# Altium PCB Fuse Block - Car Mini compact (Box-KA11 Masterkit).PcbDoc
Units mm, origin at the board's own origin, x right, y up, seen from the top; angles counter-clockwise.
Board outline 82.7 x 49.3 mm, 2 copper layers (Top Layer, Bottom Layer); 14 components, 10 nets, 30 pads, 0 vias.
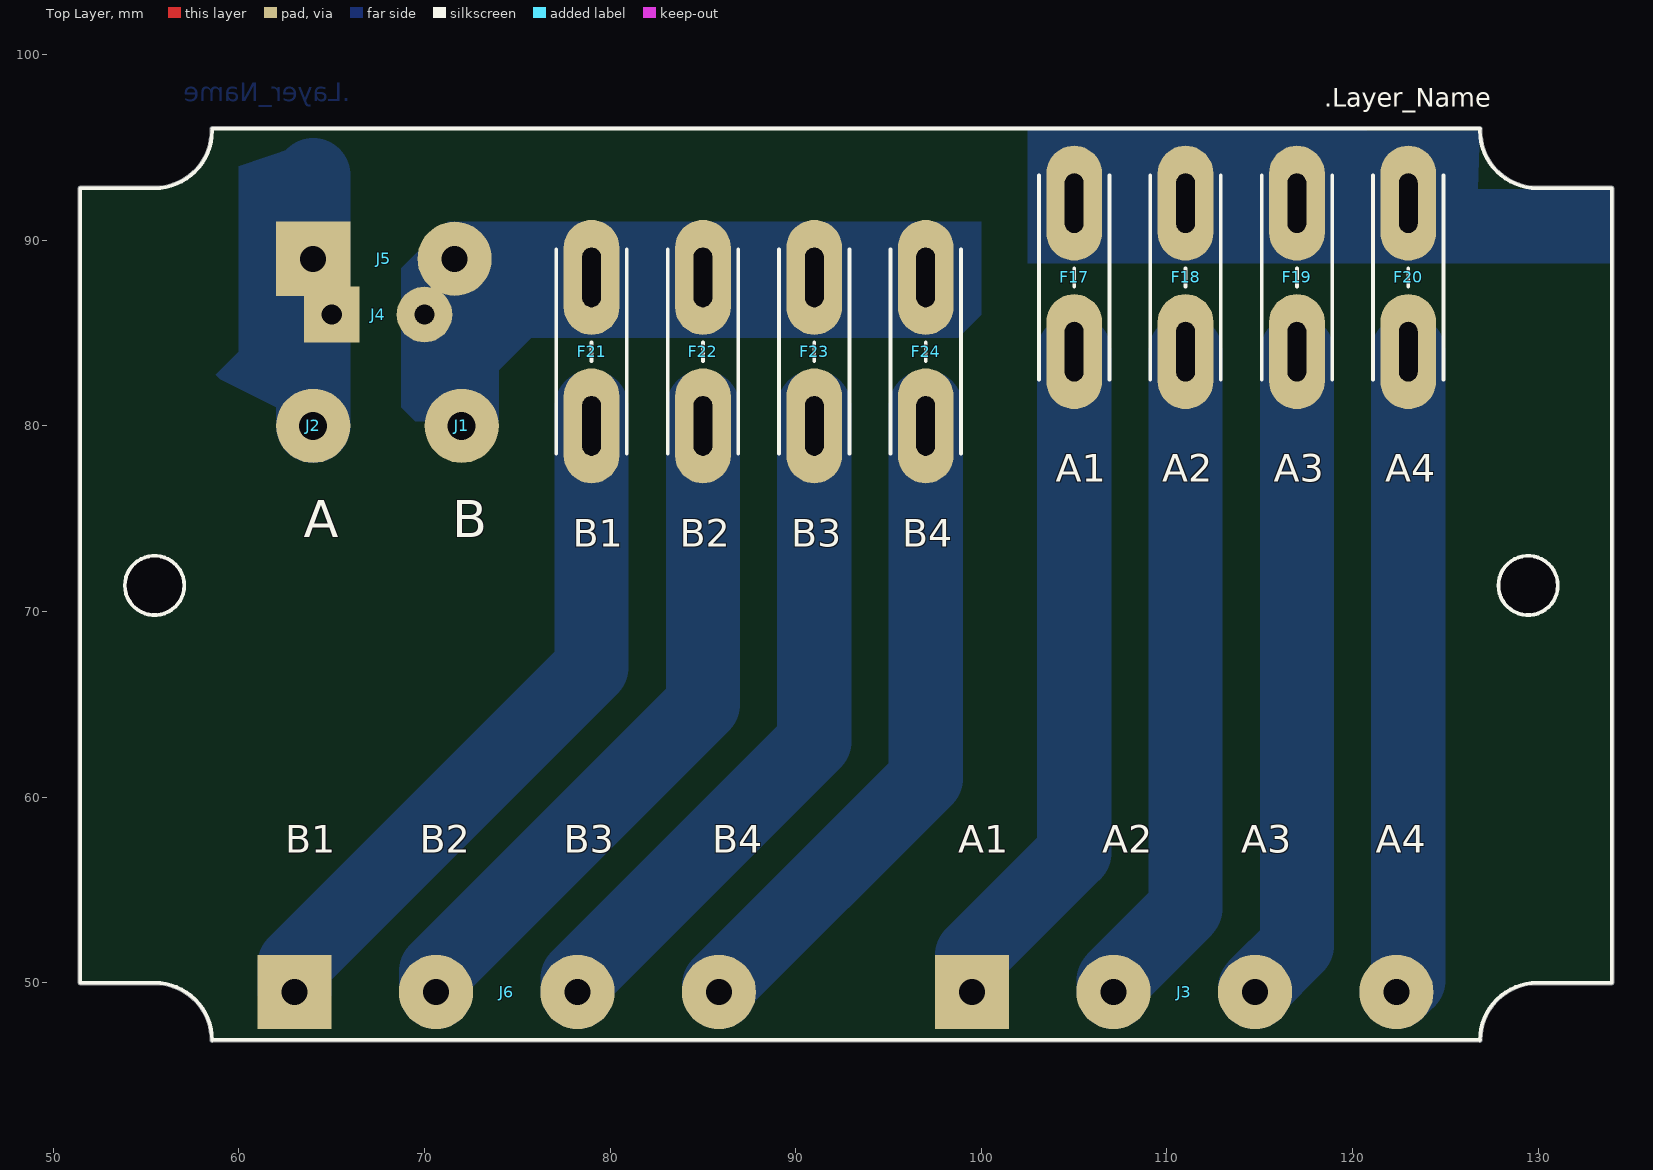
[diagram p0: Top Layer view]
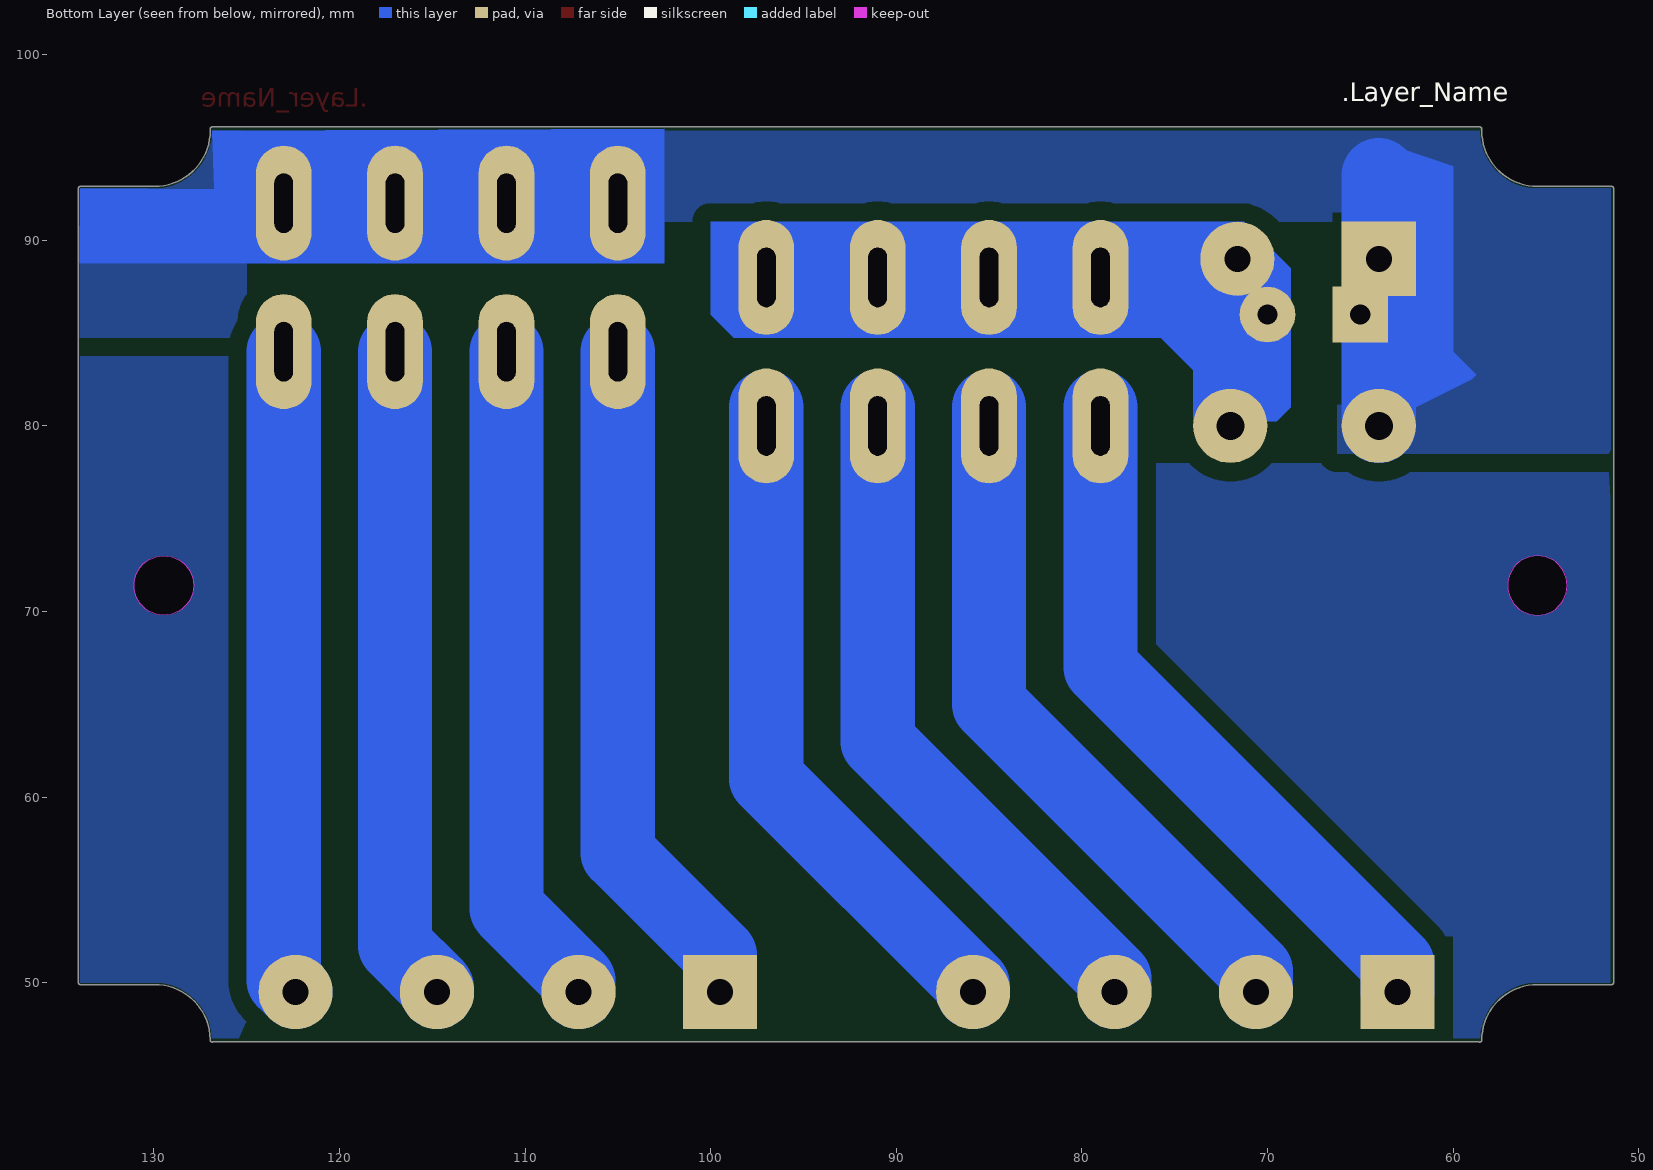
[diagram p1: Bottom Layer view, seen from below]

## Layer stack, top to bottom
Top Solder: solder mask 0.0102, Solder Resist, Dk 3.5
Top Layer: signal copper 0.0356
Dielectric 1: dielectric 0.32, FR-4, Dk 4.8
Bottom Layer: signal copper 0.0356
Bottom Solder: solder mask 0.0102, Solder Resist, Dk 3.5

## Board outline
55.458,49.902 cw(c55.458,46.902) 58.457,46.902 ccw(c58.558,46.902) 58.622,46.826 126.793,46.826 ccw(c126.858,46.902) 126.958,46.902 cw(c129.958,46.902) 126.958,46.903 ccw(c126.86,46.926) 126.961,46.926 ccw(c126.86,46.926) 126.958,46.947 cw(c129.958,46.902) 129.958,49.902 133.958,49.902 ccw(c133.958,50.002) 134.058,50.002 134.058,92.802 ccw(c133.958,92.802) 133.958,92.903 129.958,92.903 cw(c129.958,95.902) 126.958,95.902 ccw(c126.858,95.902) 126.946,95.951 ccw(c126.86,96.003) 126.96,96.003 ccw(c126.86,96.003) 126.86,96.104 58.56,96.104 ccw(c58.56,96.003) 58.472,95.955 ccw(c58.558,95.902) 58.457,95.902 cw(c55.458,95.902) 55.458,92.903 51.458,92.903 ccw(c51.458,92.802) 51.357,92.802 51.357,50.002 ccw(c51.458,50.002) 51.458,49.902
cut-out: 127.858,71.402 ccw(c129.458,71.402) 129.458,69.802 ccw(c129.458,71.402) 131.058,71.402 ccw(c129.458,71.402) 129.458,73.002 ccw(c129.458,71.402)
cut-out: 55.458,69.802 cw(c55.458,71.402) 53.858,71.402 cw(c55.458,71.402) 55.458,73.002 cw(c55.458,71.402) 57.058,71.402 cw(c55.458,71.402)

## Design rules (kind name [scope] priority, off if disabled: settings)
Clearance [All] p1: gap=1
ComponentClearance [All] p1: gap=0 collisioncheckmode=3 verticalgap=0.2 showdistances=FALSE
Height [All] p1: minheight=0 maxheight=25 prefheight=12.7
HoleSize [All] p1: absolutevalues=TRUE maxlimit=3.2 minlimit=0.4 maxpercent=80.000 minpercent=20.000
HoleToHoleClearance [All] p1: gap=0.2 allowstackedmicrovias=TRUE
PlaneClearance [All] p1: clearance=0.5
PlaneConnect [All] p1: planeconnectstyle=Relief reliefexpansion=0.508 reliefentries=4 reliefconductorwidth=0.5 reliefairgap=0.5
PolygonConnect [All] p1: connectstyle=Relief reliefconductorwidth=0.5 reliefentries=4 polygonreliefangle="90 Angle" airgapwidth=0.5
RoutingVias [All] p1: holewidth=0.7 width=1.5 viastyle="Through Hole" minholewidth=0.4 minwidth=0.4 maxholewidth=3.2 maxwidth=7
SilkToSilkClearance [All] p1: silktosilkclearance=0.05
SilkToSolderMaskClearance [IsPad] p1: minsilkscreentomaskgap=0.2 clearancetoexposedcopper=TRUE
SolderMaskExpansion [All] p1: expansion=0.1
Width [All] p1: maxlimit=4 minlimit=0.2 preferedwidth=0.5
21 further rules are at their usual default settings.

## Components (designator, comment, footprint, x,y, rotation, side; value= is the part's Value field where it differs from the comment)
F17 "A" "Fuse Car Mini" 105,92 r270 top
F18 "A" "Fuse Car Mini" 111,92 r270 top
F19 "A" "Fuse Car Mini" 117,92 r270 top
F20 "A" "Fuse Car Mini" 123,92 r270 top
F21 "A" "Fuse Car Mini" 79,88 r270 top
F22 "A" "Fuse Car Mini" 85,88 r270 top
F23 "A" "Fuse Car Mini" 91,88 r270 top
F24 "A" "Fuse Car Mini" 97,88 r270 top
J1 "OnePinC" "OnePin 1.5x4" 72,80 r0 top
J2 "OnePinC" "OnePin 1.5x4" 64,80 r0 top
J3 "A" "TBC 7.62 - 4" 99.5,49.5 r0 top
J4 "Connector" "DG301 5mm 2p" 65,86 r0 top
J5 "Connector" "TBC 7.62 - 2" 64,89 r0 top
J6 "B" "TBC 7.62 - 4" 63,49.5 r0 top

## Footprints (in the part's own frame and the unit in brackets; to place one, negate y for a bottom-side part, rotate by r counter-clockwise, add the part's x,y. Pads: shape width x height; smd on the part's side, far side on the other; paste and mask are expansions set on the pad)
"DG301 5mm 2p" [mm]
  rect 3x3 hole 1.1: 1(0,0)
  round 3 hole 1.1: 2(5,0)
  body extent -3.1,-3.4 7.5,4.2, height 10
"Fuse Car Mini" [mm] "Fuse horisontal"
  oval 6.2x3 hole 1 slot 3.2 at 0 deg: 1(0,0) 2(8,0)
  silkscreen extent -1.5,-1.9 9.5,1.9, body extent -1.45,-1.91 9.45,1.9, height 9.8
"OnePin 1.5x4" [mm]
  round 4 hole 1.5: 1(0,0)
"TBC 7.62 - 2" [mm] "Terminal Block M3 screw"
  rect 4x4 hole 1.4: 1(0,0)
  round 4 hole 1.4: 2(7.62,0)
  body extent -3.81,-6.15 11.43,6.35, height 12.5
"TBC 7.62 - 4" [mm] "Terminal Block M3 screw"
  rect 4x4 hole 1.4: 1(0,0)
  round 4 hole 1.4: 2(7.62,0) 3(15.24,0) 4(22.86,0)
  body extent -3.81,-6.15 26.67,6.35, height 12.5

## Part data
F17 F18 F19 F20 F21 F22 F23 F24: library part Fuse, "Round fuse"
J1 J2: library part "OnePin Connector", "Only pad"
J3 J6: library part "TBC - 7.62 - 4", "Terminal Block 7.62"
J4: library part DG301-5.0-2P12, "DG301 series"
J5: library part "TBC - 7.62 - 2", "Terminal Block 7.62"

## Nets (pads, with @x,y where several pads share a name; then routed paths per layer and width w, separated by ;. In a path a pad name is that pad's centre, name@x,y a point inside that pad or via, vN(x,y) a via of type N, cw(c..) or ccw(c..) an arc to the next point about the centre after c; other vN are vias at no path point)
A: F17.1 F18.1 F19.1 F20.1 J2.1 J4.1 J5.1 | length 13.5
  Bottom Layer w4: J2.1 64,93.5
A1: F17.2 J3.1 | length 36.8
  Bottom Layer w4: J3.1 99.5,51.5 105,57 F17.2
A2: F18.2 J3.2 | length 36.1
  Bottom Layer w4: J3.2 107.12,50.12 111,54 F18.2
A3: F19.2 J3.3 | length 35.4
  Bottom Layer w4: J3.3 114.74,49.74 117,52 F19.2
A4: F20.2 J3.4 | length 34.8
  Bottom Layer w4: J3.4 123,50.14 F20.2
B: F21.1 F22.1 F23.1 F24.1 J1.1 J4.2 J5.2 | length 5
  Bottom Layer w4: 72,84 J5.2@72,89
B1: F21.2 J6.1 | length 38.1
  Bottom Layer w4: J6.1 63,51 79,67 F21.2@79,81
B2: F22.2 J6.2 | length 37.5
  Bottom Layer w4: J6.2 70.62,50.62 85,65 F22.2@85,81
B3: F23.2 J6.3 | length 36.8
  Bottom Layer w4: J6.3 78.24,50.24 91,63 F23.2@91,81
B4: F24.2 J6.4 | length 36.1
  Bottom Layer w4: J6.4 85.86,49.86 97,61 F24.2@97,81

## Polygon pours and split planes (outlines as drawn)
A on Bottom Layer "Top Layer-No Net" (solid, pour order 10): 134,84.749 134,95.814 133.958,95.857 133.915,95.899 51.5,95.899 51.5,78.749 51.25,78.499 66.25,78.499 66.25,90.749 66.5,90.999 102.5,90.999 102.5,84.749
no net on Bottom Layer "Top Layer-No Net" (solid, pour order 12): 133.966,42.851 133.966,99.776 133.999,99.808 133.956,99.851 51.541,99.851 51.541,43.451 51.041,42.951

## Other copper
Top Layer:
  text ".Layer_Name" at 118.475,97.2 h1
Bottom Layer:
  pour cut-out: 61.565,79.372 62.936,78 76.064,78 76.064,82.371 76.065,82.372 61.565,82.372
  pour cut-out: 125,89 125,49.5 123,47.5 61,47.5 61,51.5 77,67.5 77,87.5 101,87.5 101,89
  region net A: 65,94 65.25,82.5 62,81 59,82.5 58.75,82.75 60,84 60,94 63,95
  region net A: 102.5,96 102.5,88.75 134,88.75 133.958,92.802 126.75,92.75 126.848,95.902
  region net B: 74,80.25 74,83 75.75,84.75 98.75,84.75 100,86 100,91 71.25,91 68.75,88.5 68.75,81 69.5,80.25
  pour cut-out: 51.457,92.802 55.453,92.802 55.458,92.798 55.575,92.8 55.701,92.812 55.944,92.831 56.418,92.945 56.869,93.132 57.077,93.259 57.285,93.387 57.656,93.704 57.815,93.893 57.955,94.056 58.101,94.276 58.228,94.491 58.322,94.716 58.415,94.941 58.529,95.416 58.567,95.902 58.567,99.893 58.558,99.902 58.555,99.9 51.5,99.9
  pour cut-out: 133.967,49.998 129.972,49.998 129.967,50.002 129.85,50 129.724,49.988 129.481,49.969 129.007,49.855 128.556,49.668 128.348,49.541 128.14,49.413 127.769,49.096 127.61,48.907 127.47,48.744 127.324,48.524 127.197,48.309 127.103,48.084 127.01,47.859 126.896,47.384 126.858,46.898 126.858,42.907 126.867,42.898 126.87,42.9 133.925,42.9
  pour cut-out: 126.86,99.9 126.86,95.905 126.855,95.9 126.858,95.783 126.87,95.657 126.889,95.414 127.003,94.939 127.189,94.488 127.317,94.28 127.444,94.072 127.761,93.701 127.95,93.543 128.114,93.403 128.334,93.257 128.548,93.129 128.774,93.036 128.999,92.943 129.474,92.829 129.96,92.79 133.95,92.79 133.96,92.8 133.958,92.802 133.958,99.858
  pour cut-out: 58.558,42.902 58.558,46.898 58.562,46.902 58.56,47.02 58.548,47.146 58.529,47.389 58.415,47.863 58.228,48.314 58.101,48.522 57.973,48.73 57.656,49.101 57.467,49.26 57.304,49.4 57.084,49.546 56.869,49.673 56.644,49.766 56.418,49.86 55.944,49.974 55.458,50.012 51.467,50.012 51.457,50.002 51.46,50 51.46,42.945
  pour cut-out: 51.5,47 134,47 134,42.975 133.925,42.9 133.88,42.945 51.46,42.945
  pour cut-out: 51.5,96 51.5,99.9 133.915,99.9 134,99.815 134,96
  text ".Layer_Name" at 66,97.5 h1

## Silkscreen, mask and mechanical layers (free items; w line width, h text height)
Top Overlay:
  circle w0.2: c129.458,71.402 r1.6
  circle w0.2: c55.458,71.402 r1.6
  lines w0.2: 58.558,46.902 ccw(c55.458,46.902) 55.458,50.002 51.458,50.002 51.458,92.802 55.458,92.802 ccw(c55.458,95.902) 58.558,95.902 ; 58.56,46.926 126.86,46.926 ; 58.56,96.003 126.86,96.003 ; 126.858,46.902 cw(c129.958,46.902) 129.958,50.002 133.958,50.002 133.958,92.802 129.958,92.802 cw(c129.958,95.902) 126.858,95.902
  text ".Layer_Name" at 118.475,97.2 h1
  text "A1" at 104,77 h1.5
  text "A2" at 109.75,77 h1.5
  text "A3" at 115.75,77 h1.5
  text "A4" at 121.75,77 h1.5
  text "A" at 63.5,74 h2
  text "B" at 71.5,74 h2
  text "B1" at 78,73.5 h1.5
  text "B2" at 83.75,73.5 h1.5
  text "B3" at 89.75,73.5 h1.5
  text "B4" at 95.75,73.5 h1.5
  text "B1" at 62.5,57 h1.5
  text "B2" at 69.75,57 h1.5
  text "B3" at 77.5,57 h1.5
  text "B4" at 85.5,57 h1.5
  text "A1" at 98.75,57 h1.5
  text "A2" at 106.5,57 h1.5
  text "A3" at 114,57 h1.5
  text "A4" at 121.25,57 h1.5
Bottom Overlay:
  text ".Layer_Name" at 66,97.5 h1
Top Solder:
  text ".Layer_Name" at 118.475,97.2 h1
Bottom Solder:
  text ".Layer_Name" at 66,97.5 h1
Mechanical 2:
  text "82 x 49 mm" at 52,100.75 h1
  text "FuseBlock - Car Mini compact - BOX-KA11 (MasterKit)" at 51.975,98.975 h1
  text ".Pcb_File_Name_No_Path" at 51.925,96.925 h1
Mechanical 3:
  text "82 x 49 mm" at 133.5,100.75 h1
  text "FuseBlock - Car Mini compact - BOX-KA11 (MasterKit)" at 133.475,98.975 h1
  text ".Pcb_File_Name_No_Path" at 133.425,96.925 h1

## Dimensions
52,47 to 134,47 on Mechanical 2
52,96 to 52,47 on Mechanical 2
52,96 to 52,47 on Mechanical 3
52,47 to 134,47 on Mechanical 3